# Altium PCB ch32v003f4p6 v1.1.PcbDoc
Units mil, origin at the board's own origin, x right, y up, seen from the top; angles counter-clockwise.
Board outline 1339 x 1105.43 mil, 2 copper layers (Top Layer, Bottom Layer); 32 components, 41 nets, 129 pads, 56 vias.
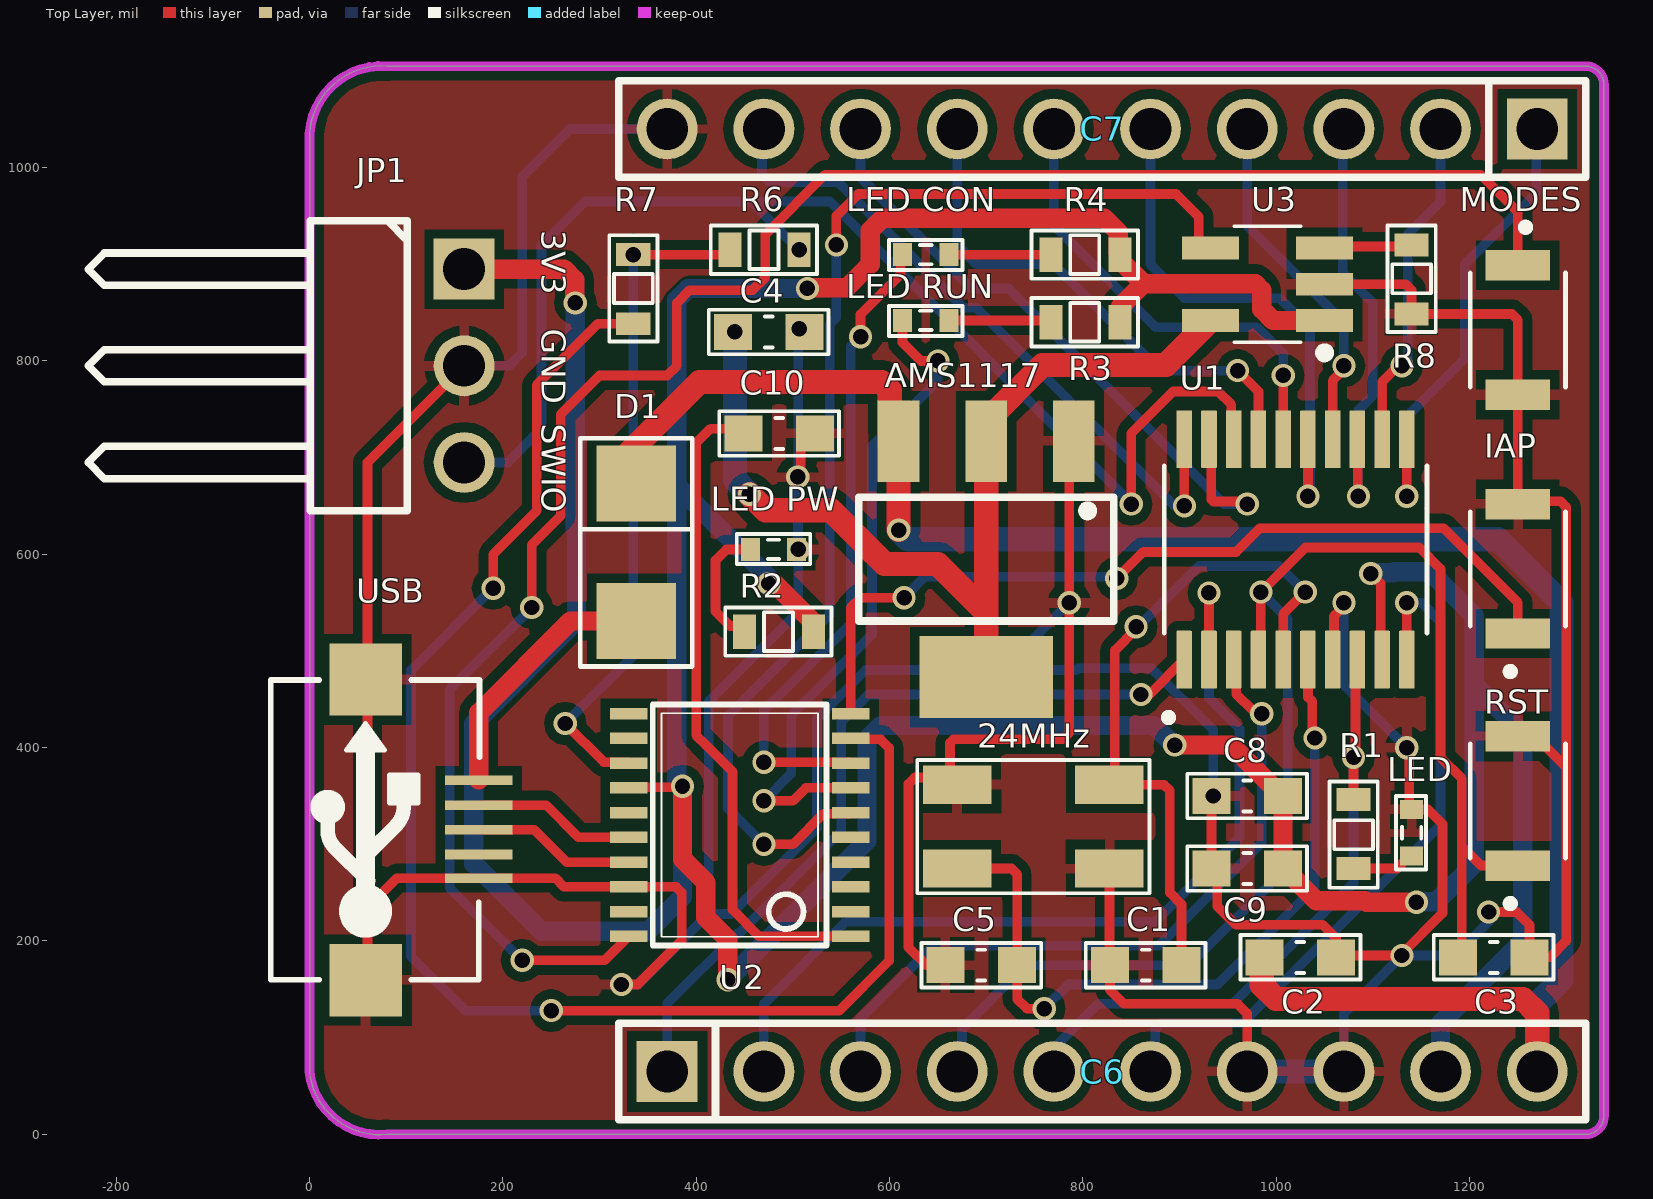
[diagram p0: Top Layer view]
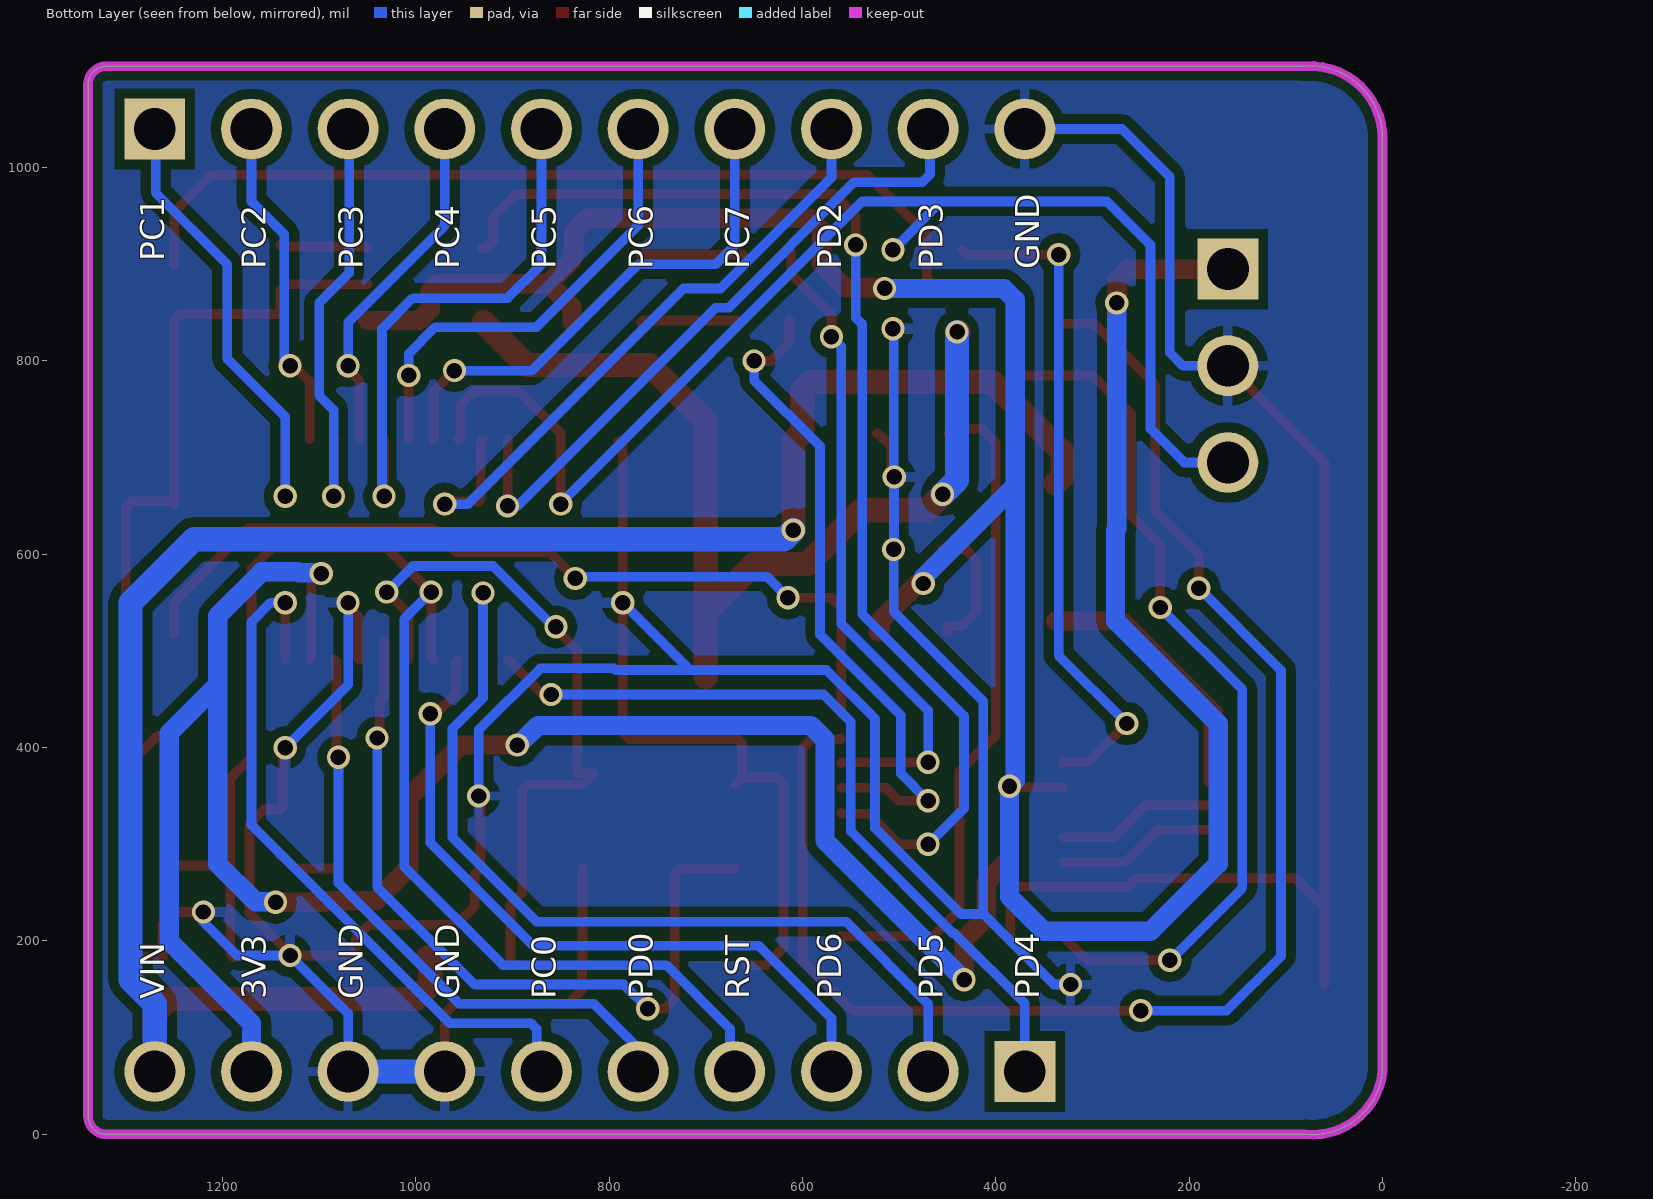
[diagram p1: Bottom Layer view, seen from below]
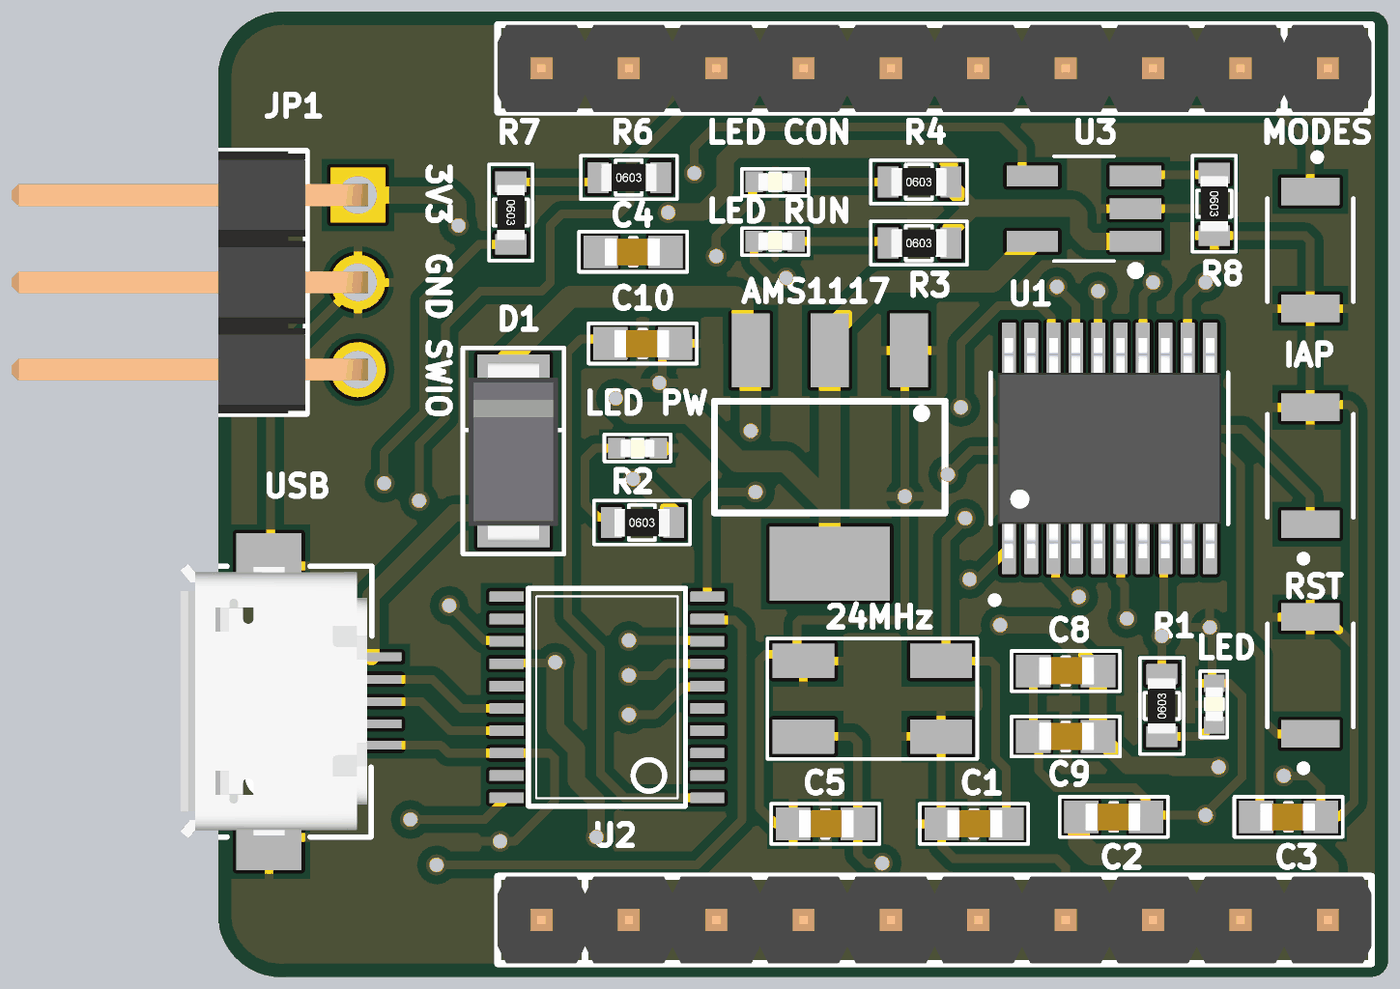
[diagram p2: 3D render of the assembled board from above, using the file's embedded part models]

## Layer stack, top to bottom
Top Solder: solder mask 0.4, Solder Resist, Dk 3.5
Top Layer: signal copper 1.4
Dielectric 1: dielectric 12.6, FR-4, Dk 4.8
Bottom Layer: signal copper 1.4
Bottom Solder: solder mask 0.4, Solder Resist, Dk 3.5

## Board outline
0,65 ccw(c72.5,72.5) 80,0 1320,0 ccw(c1320,19) 1339,19 1339,1086 ccw(c1320,1086) 1320,1105 80,1105 ccw(c75,1030) 0,1035

## Design rules (kind name [scope] priority, off if disabled: settings)
Clearance [All] p1: gap=10 ignorepadtopadclearanceinfootprint=FALSE except(0: Arc-Hole Track-Hole SMDPad-Hole THPad-Hole Via-Hole Fill-Hole Poly-Hole Region-Hole Text-Hole)
PolygonConnect [All] p1: connectstyle=Relief reliefconductorwidth=10 reliefentries=4 polygonreliefangle="90 Angle" airgapwidth=10
RoutingVias [All] p1: holewidth=16 width=24 viastyle="Through Hole" minholewidth=16 minwidth=24 maxholewidth=16 maxwidth=24
SolderMaskExpansion [All] p1: expansion=4
Width [All] p1: maxlimit=25 minlimit=10 preferedwidth=20 minimp=50.000000 maximp=50.000000 favimp=50.000000
30 further rules are at their usual default settings.

## Components (designator, comment, footprint, x,y, rotation, side; value= is the part's Value field where it differs from the comment)
24MHz "24MHz" "Crystal 4 pin SMD 50x32" 748.74,318.31 r180 top (schematic designator Y1)
AMS1117 "AMS1117-3.3V" SOT223 700,595 r180 top value="AMS1117-3.3V SOT223" (schematic designator AMS1)
C1 "104" CAP_0603 865,175 r0 top value=33p
C2 "104" CAP_0603 1025,183.03 r180 top value=33p
C3 "104" CAP_0603 1225,183.03 r180 top value=33p
C4 "104" CAP_0603 475,830 r180 top value=33p
C5 "104" CAP_0603 695,175 r0 top value=33p
C6 "JP10" JP10-D1T 370,65 r0 top
C7 "JP10" JP10-D1T 1270,1040 r180 top
C8 "104" CAP_0603 970,350 r0 top value=33p
C9 "104" CAP_0603 970,275 r0 top value=33p
C10 "104" CAP_0603 485.86,725 r180 top value=33p
D1 "1N4007" DIO-214AC(SMA) 340,605 r270 top
IAP "B3U-1000P" SW_B3U-1000P 1250,585 r90 top (schematic designator S2)
JP1 "JP 1x3 2.54" "JP 1x3 DC" 60,645 r270 top
LED "LED3" CAP_0402 1140,312.03 r90 top (schematic designator LED1)
"LED CON" "LED3" CAP_0402 637.5,910.01 r180 top (schematic designator LED4)
"LED PW" "LED3" CAP_0402 480,605 r0 top (schematic designator LED2)
"LED RUN" "LED3" CAP_0402 637.5,841.94 r180 top (schematic designator LED3)
MODES "B3U-1000P" SW_B3U-1000P 1250,832 r270 top (schematic designator S3)
R1 "1k" RES-SMD-0603 1080,310 r90 top value="R1/4W - 1K"
R2 "1k" RES-SMD-0603 485,520 r0 top value="R1/4W - 1K"
R3 "1k" RES-SMD-0603 802,840 r0 top value="R1/4W - 1K"
R4 "1k" RES-SMD-0603 802,910 r0 top value="R1/4W - 1K"
R6 "100R" RES-SMD-0603 470,915 r0 top value="R1/4W - 1K"
R7 "100R" RES-SMD-0603 335,875 r270 top value="R1/4W - 1K"
R8 "15k" RES-SMD-0603 1140,885 r270 top value="R1/4W - 1K"
RST "B3U-1000P" SW_B3U-1000P 1250,345 r90 top (schematic designator S1)
U1 "CH32V003F4P6" SOP65P640X121-20N 1020,605 r90 top
U2 "CH32V305FBP6" TSSOP-20 445,320 r90 top (schematic designator IC2)
U3 "DIO7002BST5" SOT23-5 990.94,879.33 r180 top (schematic designator IC3)
USB "USB-5" USB-M1 175,315 r90 top (schematic designator J1)

## Footprints (in the part's own frame and the unit in brackets; to place one, negate y for a bottom-side part, rotate by r counter-clockwise, add the part's x,y. Pads: shape width x height; smd on the part's side, far side on the other; paste and mask are expansions set on the pad)
CAP_0402 [mm]
  rect 0.5x0.6 smd: 1(-0.61,0) 2(0.61,0)
  silkscreen extent -0.97,-0.38 0.97,0.41, body extent -0.5,-0.27 0.5,0.26, height 0.35
CAP_0603 [mm]
  rect 1x0.95 smd mask+0.076: 1(-0.94,0) 2(0.94,0)
  silkscreen extent -1.57,-0.58 1.57,0.58, body extent -0.77,-0.39 0.83,0.41, height 0.9
"Crystal 4 pin SMD 50x32" [mm] "Quartz Crystal, SM; Body 6.0 x 3.5 mm (LxW)"
  rect 1.8x1 smd: 1(-2,-1.1) 2(2,-1.1) 3(2,1.1) 4(-2,1.1)
  silkscreen extent -3.05,-1.75 3.05,1.75, body extent -2.48,-1.6 2.53,1.6, height 0.9
DIO-214AC(SMA) [mm] "DO-214AC Diode Smallest Size"
  rect 2x2.1 smd: 1(1.88,-0.051) 2(-1.732,-0.051)
  silkscreen extent -2.92,-1.52 3.07,1.42, body extent -2.5,-1.35 2.7,1.25, height 2.4
JP10-D1T [mm] "10 pins, 1 row, straight, gold plating"
  rect 1.6x1.6 hole 1.1: 1(0,0)
  round 1.6 hole 1.1: 2(2.54,0) 3(5.08,0) 4(7.62,0) 5(10.16,0) 6(12.7,0) 7(15.24,0) 8(17.78,0) 9(20.32,0) 10(22.86,0)
  silkscreen extent -1.27,-1.27 24.13,1.27, body extent -1.27,-1.27 24.13,1.27, height 8.54
"JP 1x3 DC" [mm]
  rect 1.6x1.6 hole 1.1: 1(-6.35,2.54)
  round 1.6 hole 1.1: 2(-3.81,2.54) 3(-1.27,2.54)
  silkscreen extent -7.62,-7.34 0,1.04, body extent -7.62,-7.52 0,2.84, height 2.55
RES-SMD-0603 [mm]
  rect 0.6x0.9 smd: 1(-0.889,0) 2(0.927,0)
  silkscreen extent -1.4,-0.64 1.4,0.64, body extent -0.8,-0.4 0.8,0.4, height 0.43
SOP65P640X121-20N [mm]
  rrect12% 1.52x0.41 smd: 1(-2.895,2.925) 2(-2.895,2.275) 3(-2.895,1.625) 4(-2.895,0.975) 5(-2.895,0.325) 6(-2.895,-0.325) 7(-2.895,-0.975) 8(-2.895,-1.625) 9(-2.895,-2.275) 10(-2.895,-2.925) 11(2.895,-2.925) 12(2.895,-2.275) 13(2.895,-1.625) 14(2.895,-0.975) 15(2.895,-0.325) 16(2.895,0.325) 17(2.895,0.975) 18(2.895,1.625) 19(2.895,2.275) 20(2.895,2.925)
  silkscreen extent -4.51,-3.45 2.2,3.45, body extent -3.2,-3.25 3.2,3.25, height 1.1
SOT23-5 [mm] "SOT23, 5-Leads, Body 3.0x3.0mm (max), Pitch 0.95mm, IPC Medium Density"
  rect 1.5x0.6 smd: 1(-1.5,0.95) 2(-1.5,0) 3(-1.5,-0.95) 4(1.5,-0.95) 5(1.5,0.95)
  silkscreen extent -1.63,-1.52 0.87,1.92, body extent -1.75,-1.52 1.75,1.53, height 1.45
SOT223 [mm] "SOT-223/SC-73; 4 Leads; Body 6.7 x 7.3 mm, inc. leads (LxW max)"
  rect 1.1x2.15 smd: 1(-2.3,-3.1) 2(0,-3.1) 3(2.3,-3.1)
  rect 3.5x2.15 smd: 4(0,3.1)
  silkscreen extent -3.35,-1.63 3.35,1.63, body extent -3.43,-1.65 3.43,1.65, height 2.54
SW_B3U-1000P [mm]
  rect 0.8x1.7 smd: 1(-1.7,0) 2(1.7,0)
  silkscreen extent -2.8,-1.25 1.5,1.25
TSSOP-20 [mil] "TSSOP-20"
  rect 12x39 smd: 1(-115.16,-114.87) 2(-89.57,-114.87) 3(-63.98,-114.87) 4(-38.39,-114.87) 5(-12.8,-114.87) 6(12.8,-114.87) 7(38.39,-114.87) 8(63.98,-114.87) 9(89.57,-114.87) 10(115.16,-114.87) 11(115.16,114.87) 12(89.57,114.87) 13(63.98,114.87) 14(38.39,114.87) 15(12.8,114.87) 16(-12.8,114.87) 17(-38.39,114.87) 18(-63.98,114.87) 19(-89.57,114.87) 20(-115.16,114.87)
  silkscreen extent -125,-90 125,90
USB-M1 [mil]
  rect 10x70 smd: 1(51.18,0) 2(25.59,0) 3(0,0) 4(-25.59,0) 5(-50,0)
  rect 74.8x74.8 smd: 5(-155.51,116.84) 5(155.51,116.84)
  silkscreen extent -155,-1 155,215, body extent -157,5 158,218, height 107

## Part data
24MHz: library part "XTAL_4Pin SMD", "Crystal Oscillator", LatestRevisionDate=17-Jul-2002, LatestRevisionNote="Re-released for DXP Platform.", PackageReference=R38, Published=8-Jun-2000, Publisher="Altium Limited"
AMS1117: library part "AMS1117 SMD", "Dán", Chung_Loai=Dán, Don_Vi=Con, Ma_Hang=MH000596
C1 C2 C3 C4 C5 C8 C9 C10: library part CapSMD, "Capacitor", LatestRevisionDate=17-Jul-2002, LatestRevisionNote="Re-released for DXP Platform.", PackageReference=RAD-0.3, Published=8-Jun-2000, Publisher="Altium Limited"
C6 C7: "WR-PHD 2.54 mm Angled Socket Header", Manufacturer="W¨¹rth Elektronik eiSos GmbH", partNo=613010143121, ComponentLink1 Description=Manufacturer, ComponentLink1URL=http://www.we-online.com, ComponentLink2 Description=Datasheet, ComponentLink2URL=http://katalog.we-online.de/em/datasheet/6130xx143121.pdf, Created by="Karrer Zheng", Created Date="29 March 2013", NoPins=10
D1: library part D1A, "Diode 1A"
IAP MODES RST: "Switch Tactile N.O. SPST Round Button Gull Wing 0.05A 12VDC 1.5N SMD Embossed T/R", Package=None, Availability=Unavailable, MP=B3U-1000P, Price=None
JP1: library part "JP 1x3 2.54 Duc Cong", "C?m", Chung_Loai=C?m, Don_Vi=Con, Ma_Hang=MH000904, Ten_Linh_Kien="Jump Ðon Ð?c 2.54MM 1x40P Cong Ð?ng"
LED "LED CON" "LED PW" "LED RUN": library part LED0805, "LED SMD 0805"
R1 R2 R3 R4 R6 R7 R8: library part RES, "Resistor 1/4W"
U1: "Industrial-grade general-purpose microcontroller", Package=Package, Check_prices=https://www.snapeda.com/parts/CH32V003F4P6/WCH/view-part/?ref=eda, MF=WCH, MP=CH32V003F4P6, SnapEDA_Link=https://www.snapeda.com/parts/CH32V003F4P6/WCH/view-part/?ref=snap
U3: library part "DIO7002BST5 SMD"
USB: Manufacturer=FCI, Manufacturer Part Number=10118193-0001LF, Supplier Part Number 1=609-4616-1-ND, .Checked PCB=RF, .Checked SCH=MM, .Creator=MM, Category="Connectors, Interconnects", ComponentLink1Description=http://portal.fciconnect.com/Comergent//fci/drawing/10118193.pdf, ComponentLink1URL=http://portal.fciconnect.com/Comergent//fci/drawing/10118193.pdf, Connector Type="USB - micro B", Features="Shielded, Solder Retention", Gender=Receptacle, Ingress Protection=-, Mounting Type="Surface Mount, Right Angle, Horizontal", Number of Contacts=5, Packaging="Cut Tape (CT)", Pricing 1="1=0.46, 10=0.433, 25=0.3712, 50=0.3156, 100=0.3032, 250=0.27224, 500=0.25988 (USD)", RoHS="RoHS Compliant", Specifications="USB 2.0", Stock 1=28642, Supplier 1=Digi-Key

## Via types
v1: diameter 24, hole 16, Top Layer to Bottom Layer, tented both sides, 56 vias

## Nets (pads, with @x,y where several pads share a name; then routed paths per layer and width w, separated by ;. In a path a pad name is that pad's centre, name@x,y a point inside that pad or via, vN(x,y) a via of type N, cw(c..) or ccw(c..) an arc to the next point about the centre after c; other vN are vias at no path point)
3V3: C6.9 C8.2 C9.2 JP1.1 R2.2 R3.2 R4.2 U1.9 U2.14 U3.1 | length 4994.3
  Top Layer w10: U2.14 330.93,359.19 385.05,359.19 v1(385.86,360) ; v1(1097.82,580) 1108,569.82 1108,492.59 U1.9
  Top Layer w20: JP1.1 263.28,895 274.23,884.05 274.23,860.77 v1(275,860) ; v1(385.86,360) 385.86,284.71 410.05,260.52 410.05,224.44 432.49,202 432.49,160.37 v1(432.86,160) ; v1(475,569.82) 481.05,569.82 519.7,531.17 519.7,521.79 R2.2 ; v1(515,875) 515.77,875.77 555.77,875.77 580,900 580,935 592.72,947.72 822.24,947.72 836.68,933.28 836.68,911.82 R4.2 838.49,904.1 862.59,880 ; R3.2 838.49,855.9 862.59,880 ; v1(895,402.68) 953.34,402.68 1006.02,350 C8.2 C9.2 1007.98,275 1041.25,241.74 1091.72,241.74 1093.45,240 v1(1145,240) ; U3.1 996.72,841.93 985,853.64 985,873.21 978.21,880 862.59,880
  Bottom Layer w20: v1(275,860) 275,626.21 276.21,625 276.21,531.21 170,425 170,280 240,210 350,210 385.86,245.86 v1(385.86,360) 380,365.86 380,670.87 ; v1(432.86,160) 576.63,303.77 576.63,408.37 591.26,423 873.6,423 893.15,403.44 894.23,403.44 v1(895,402.68) ; v1(475,569.82) 475,575.87 380,670.87 ; v1(515,875) 391.72,875 380,863.28 380,670.87 ; v1(1097.82,580) 1098.58,580.77 1120.67,580.77 1121.82,581.92 1159.2,581.92 1205,536.12 1205,465 ; v1(1145,240) 1145.77,240.77 1165.77,240.77 1205,280 1205,465 ; C6.9 1170,115 1255,200 1255,415 1205,465
3V3IN: AMS1117.2 AMS1117.4 C4.2 U3.5 | length 1008.8
  Top Layer w25: C4.2 v1(440,830) ; v1(455,662.2) 471.7,645.5 539.5,645.5 574.45,610.55 ; 574.45,610.5 594.95,590 649.92,590 700,539.92 ; AMS1117.4 700,539.92 ; U3.5@930,840.04 885.85,795.89 758.17,795.89 700,737.72 700,539.92
  Bottom Layer w25: v1(440,830) 440,677.2 v1(455,662.2)
5VIN: AMS1117.3 C2.2 C6.10 D1.2 | length 2086.2
  Top Layer w25: D1.2 330.93,680.27 330.93,705.93 403.36,778.36 591.64,778.36 600.3,769.7 600.3,726.2 AMS1117.3 v1(609.45,625) ; C2.2 985,180.03 985,154.64 999.64,140 1255.36,140 1270,125.36 C6.10
  Bottom Layer w25: v1(609.45,625) 618.95,615.5 1229.5,615.5 1295,550 1295,160 1270,135 C6.10
D+: U2.17 USB.3 | length 169
  Top Layer w10: USB.3 232.59,315 265.98,281.61 U2.17
D-: U2.16 USB.2 | length 169
  Top Layer w10: USB.2 244.9,340.59 278.28,307.2 U2.16
D_SWCLK: U2.15
D_SWDIO: R6.1 R7.1 U2.13 | length 702.4
  Top Layer w10: v1(264.49,425) 304.51,384.98 329.13,384.98 U2.13 ; R7.1@332.5,907.5 v1(335,910) 430,910.01 R6.1
  Bottom Layer w10: v1(264.49,425) 335,495.51 v1(335,910)
GND: 24MHz.2 24MHz.4 "LED PW.2" AMS1117.1 C1.1 C2.1 C3.1 C4.1 C5.1 C6.7 C6.8 C7.10 C8.1 C9.1 C10.1 IAP.2 JP1.2 LED.2 MODES.2 R8.2 RST.2 U1.7 U2.18 U3.2 USB.5 | length 6662.8
  Top Layer w10: USB.5@60,155 60,235 ; USB.5@60,466.02 60,235 ; USB.5@60,471.02 60,695 JP1.2 ; v1(322.68,155) 339.48,155 385.05,200.57 385.05,250.17 379.19,256.02 U2.18 263.28,256.02 254.31,265 175,265 90.35,265 60.35,235 60,235 ; v1(505,680) 505,683.79 508.17,686.96 508.17,711.3 521.87,725 C10.1 ; C5.1 638.03,175 619.57,193.47 619.57,362.55 626.15,369.13 24MHz.2@662.48,369.13 ; 24MHz.2 24MHz.2@662.48,369.13 ; AMS1117.1 786,712.5 v1(786,549.92) 786,415.42 779.14,408.57 666.05,408.57 662.48,405 24MHz.2@662.48,369.13 ; 24MHz.4 827.48,175.52 C1.1 828,149.54 842.54,135 960,135 970,125 C6.7 ; C8.1@933,345 C9.1 939.14,268.86 939.14,235.86 958.26,216.74 1048.26,216.74 1062,203 C2.1 1063.97,185 v1(1130,185) 1130,186.82 1172,228.82 1172,321 1156.97,336.03 LED.2 1137.5,338.53 1137.5,397.5 v1(1135,400) ; U3.2 1134.15,879.33 1140,873.47 R8.2 1243.93,848.51 1250,842.45 MODES.2 IAP.2 1253.07,655 1294.14,655 1300,649.14 1300,380 ; U1.7 1059.73,492.37 1059.73,535.94 1070,546.21 v1(1070,550) ; v1(1219.63,230) 1248.74,230 1262,216.74 C3.1 1283,183.03 1300,200.03 1300,380 ; RST.2 1267.72,411.93 1299.65,380 1300,380
  Bottom Layer w10: JP1.2 206.5,795 220,808.5 220,990.51 269.49,1040 C7.10@375,1040 ; v1(322.68,155) 340,155 412.86,227.86 ; v1(506.49,833.28) 505.74,832.54 505.74,680.74 v1(505,680) 505.37,679.63 505.37,605.37 v1(505.74,605) 505.74,540.74 412.86,447.86 412.86,227.86 ; v1(786,549.92) 716.48,480.4 ; v1(935,350) 935,418.18 871.18,482 794.63,482 793.03,480.4 716.48,480.4 ; C6.8 1070,125 v1(1130,185) 1185,185 1219.63,219.63 v1(1219.63,230) ; v1(1070,550) 1070,465 v1(1135,400) ; 412.86,227.86 436.04,227.86 525,316.82 525,430 575.4,480.4 716.48,480.4
  Bottom Layer w25: C6.7 C6.8
IAP: IAP.1 U2.10 | length 899.3
  Top Layer w10: U2.10 559.87,544.87 570,555 v1(615,555) ; v1(835,575) 862.34,602.34 958.59,602.34 983.25,627 1173,627 1250,550 IAP.1
  Bottom Layer w10: v1(615,555) 636.92,576.92 833.08,576.92 v1(835,575)
LED_CON: "LED CON.2" U2.8 | length 677.3
  Top Layer w10: v1(470,385) 558.85,385 U2.8 ; v1(570,825) 570,848.3 611.7,890 611.7,908.2 613.5,910.01 611.7,911.82
  Bottom Layer w10: v1(470,385) 470,438.51 560,528.51 560,815 v1(570,825)
LED_RUN: "LED RUN.2" U2.7 | length 692.2
  Top Layer w10: v1(470,345) 500,345 513.39,358.39 U2.7 ; 613.5,841.94 613.5,819.09 632.6,800 v1(650,800)
  Bottom Layer w10: v1(470,345) 498.18,373.18 498.18,433.18 581.95,516.95 581.95,711.95 650,780 v1(650,800)
MODES: MODES.1 U2.20 | length 1991.9
  Top Layer w10: v1(220,180) 305.28,180 U2.20 ; v1(230,545) 230,610 260,640 260,745 300,785 370,785 380,795 380,860 393.21,873.21 458.21,873.21 471.49,886.49 471.49,930.75 533.46,992.72 1211.43,992.72 1250,954.14 MODES.1
  Bottom Layer w10: v1(220,180) 145,255 145,460 v1(230,545)
NetC10_2: C10.2 U2.1 | length 698
  Top Layer w10: C10.2@440,725 C10.2 443.86,730 415,730 400,715 400,412.68 410,402.68 437.5,375.18 437.5,232.34 465,204.84 U2.1
NetIC3_3: R8.1 U3.3 | length 91.4
  Top Layer w10: U3.3 1051.64,918.37 1138.36,918.37 R8.1
NetLED1_1: LED.1 R1.1 | length 65.4
  Top Layer w10: R1.1 1125,275 1138.03,288.03 LED.1
NetLED2_1: "LED PW.1" R2.1 | length 135.7
  Top Layer w10: R2.1 450,525.91 435.04,525.91 420,540.94 420,593.84 431.16,605 456,605
NetLED3_1: "LED RUN.1" R3.1 | length 106.3
  Top Layer w10: 661.5,841.94 765.06,841.94 R3.1
NetLED4_1: "LED CON.1" R4.1 | length 105.5
  Top Layer w10: 661.5,910.01 R4.1
PB12: U2.5
PB13: U2.6 U3.4 | length 1249.8
  Top Layer w10: v1(470,300) 500,300 531.8,331.8 558.87,331.8 U2.6 ; v1(545,920) 545,950 567.72,972.72 896.43,972.72 920,949.14 920,923.54 926.81,916.73 U3.4
  Bottom Layer w10: v1(470,300) 432.86,337.14 432.86,432.86 538.18,538.18 538.18,838.18 545,845 v1(545,920)
PC0: C6.6 U1.10 | length 740.7
  Top Layer w10: v1(1135.08,549.92) 1135.08,491.1 U1.10
  Bottom Layer w10: C6.6 875,70 875,109.14 880.86,115 965,115 1170,320 1170,530 1150.08,549.92 v1(1135.08,549.92)
PC1: C7.1 U1.11 | length 497
  Top Layer w10: v1(1135,660) 1135.08,660.08 1135.08,718.9 U1.11
  Bottom Layer w10: v1(1135,660) 1135,742 1195,802 1195,900 1269,974 1269,1034 C7.1@1275,1040
PC2: C7.2 U1.12 | length 348.3
  Top Layer w10: U1.12 1109.57,778.36 1126.21,795 v1(1130,795)
  Bottom Layer w10: v1(1130,795) 1136,801 1136,931 1170,965 C7.2
PC3: C7.3 U1.13 | length 460.9
  Top Layer w10: U1.13 1084.49,718.46 1084.49,660.51 v1(1085,660)
  Bottom Layer w10: C7.3@1075,1040 1069,1034 1069,891 1100,860 1100,764.39 1085,749.39 v1(1085,660)
PC4: C7.4 U1.14 | length 374.3
  Top Layer w10: U1.14 1058.39,779.6 1070,791.21 v1(1070,795)
  Bottom Layer w10: C7.4 C7.4@970,1035 ; C7.4@975,1040 C7.4@970,1035 ; v1(1070,795) 1070,840 970,940 C7.4@970,1035
PC5: C7.5 U1.15 | length 565.8
  Top Layer w10: v1(1032.8,660) U1.15
  Bottom Layer w10: C7.5 870,900 905,865 1003.28,865 1035,833.28 1035,662.2 v1(1032.8,660)
PC6: C7.6 U1.16 | length 480.8
  Top Layer w10: U1.16 v1(1007.2,785)
  Bottom Layer w10: C7.6 770,940 875,835 980,835 1007.2,807.8 v1(1007.2,785)
PC6_WCH: R7.2 U2.9 | length 1574
  Top Layer w10: v1(190,565) 190,600 235,645 235,775 298.52,838.52 R7.2 ; v1(250,128) 548,128 599.57,179.57 599.57,399.58 590.58,408.57 560.87,408.57 U2.9
  Bottom Layer w10: v1(190,565) 105,480 105,184.14 161.14,128 v1(250,128)
PC7: C7.7 U1.17 | length 543.8
  Top Layer w10: v1(960,790) 981.61,768.39 U1.17
  Bottom Layer w10: C7.7 670,920 690,900 770,900 880,790 v1(960,790)
PD0: C6.5 R1.2 U1.8 | length 681.1
  Top Layer w10: R1.2 v1(1080,390) 1081.99,391.99 1081.99,489.04 U1.8
  Bottom Layer w10: C6.5 770,89.14 815.86,135 955,135 1080,260 v1(1080,390)
PD2: C7.8 U1.19 | length 692.5
  Top Layer w10: U1.19 932.95,716.46 932.95,656.66 935,654.61 967.32,654.61 v1(970,651.93)
  Bottom Layer w10: C7.8 570,989.75 684.75,875 723,875 946.07,651.93 v1(970,651.93)
PD3: C7.9 U1.20 | length 695.9
  Top Layer w10: U1.20 904.92,718.9 904.92,650.08 v1(905,650)
  Bottom Layer w10: C7.9 468,1038 468,993 476,985 546.47,985 676.47,855 690,855 895,650 v1(905,650)
PD4: C6.1 U1.1 | length 818.8
  Top Layer w10: v1(860,455) 868.82,455 U1.1
  Bottom Layer w10: C6.1 370,135.33 442.53,207.86 444.33,207.86 550,313.53 550,426.72 578.28,455 v1(860,455)
PD5: C6.2 U1.2 | length 968.3
  Top Layer w10: U1.2 v1(930.43,560)
  Bottom Layer w10: C6.2 470,135 555,220 875,220 962,307 962,419.82 930.43,451.38 v1(930.43,560)
PD6: C6.3 U1.3 | length 750.2
  Top Layer w10: U1.3 958.54,488.5 958.54,455.46 976.32,437.68 982.32,437.68 v1(985,435)
  Bottom Layer w10: C6.3 570,120 645,195 878.43,195 985,301.57 v1(985,435)
RST: C3.2 C6.4 RST.1 U1.4 | length 1512.1
  Top Layer w10: U1.4 984.13,493.54 v1(984.13,560.87) 1030.27,607 1148,607 1170,585 1170,390 1192,368 1192,298 ; C3.2 1192,187.03 1192,298 ; RST.1 1211.93,278.07 1192,298
  Bottom Layer w10: C6.4 675,70 675,109.14 740.86,175 910,175 1012,277 1012,533 v1(984.13,560.87)
RST-WHC: U2.11
SWIO: JP1.3 R6.2 U1.18 | length 1351.4
  Top Layer w10: v1(850,651.93) 850,725.04 893.35,768.39 940,768.39 953.5,754.88 953.5,721.5 U1.18
  Bottom Layer w10: JP1.3 205,695 240,730 240,920 285,965 456.49,965 ; v1(506.49,915) 456.49,965 ; v1(850,651.93) 850,653.18 538.18,965 456.49,965
VCC: D1.1 USB.1 | length 271.7
  Top Layer w20: USB.1@175,366.69 175,436 270,531 D1.1
XI: 24MHz.1 C1.2 U1.5 | length 736.6
  Top Layer w10: v1(855,525) 855,522.75 833,500.75 833,373.24 815.86,373.24 24MHz.1 884.14,361.61 890,355.76 890,250 902,238 C1.2 ; U1.5 1007.2,538.07 v1(1030,560.87)
  Bottom Layer w10: v1(855,525) 857.25,525 920.12,587.87 1003,587.87 v1(1030,560.87)
XO: 24MHz.3 C5.2 U1.6 | length 816
  Top Layer w10: 24MHz.3 726.14,275 732,269.14 C5.2 732,140 742,130 v1(760,130) ; U1.6@1032.8,511.02 U1.6 1032.8,452.2 1037.32,447.68 1037.32,412.68 v1(1040,410)
  Bottom Layer w10: v1(760,130) 785,155 939.13,155 1040,255.87 v1(1040,410)
pads on no net: U2.2 U2.3 U2.4 U2.12 U2.19 USB.4

## Polygon pours and split planes (outlines as drawn)
GND on Bottom Layer "GND_L02_P000" (solid, pour order 0): 0,1035 5,1040 5,1065 40,1100 60,1100 65,1105 1320,1105 1325,1100 1330,1100 1339,1091 1339,10 1335,10 1325,0 1275,0 60,0 55,5 40,5 0,45
GND on Top Layer "GND_L01_P004" (solid, pour order 4): 1310,1105 1320,1105 1325,1100 1335,1100 1339,1096 1339,9 1330,0 1290,0 80,0 50,0 40,10 30,10 5,35 5,55 0,60 0,1050 5,1055 5,1060 10,1065 10,1070 35,1095 45,1095 55,1105 80,1105 225,1105 1320,1105

## Keep-outs
Keep-Out Layer:
  the board outline again, w10

## Silkscreen, mask and mechanical layers (free items; w line width, h text height)
Top Overlay:
  text "3V3" at 240,935 h25 r270
  text "GND" at 240,833.28 h25 r270
  text "SWIO" at 240,735.28 h25 r270
Bottom Overlay:
  text "PC1" at 1260,903.33 h25 r270
  text "GND" at 355,895 h25 r270
  text "PD3" at 455,895 h25 r270
  text "PD2" at 560,895 h25 r270
  text "PC7" at 655,895 h25 r270
  text "PC6" at 755,895 h25 r270
  text "PC5" at 855,895 h25 r270
  text "PC4" at 955,895 h25 r270
  text "PC3" at 1055,895 h25 r270
  text "PC2" at 1155,895 h25 r270
  text "PD4" at 355,140 h25 r270
  text "PD5" at 455,140 h25 r270
  text "PD6" at 560,140 h25 r270
  text "RST" at 655,140 h25 r270
  text "PD0" at 755,140 h25 r270
  text "PC0" at 855,140 h25 r270
  text "GND" at 955,140 h25 r270
  text "GND" at 1055,140 h25 r270
  text "3V3" at 1155,140 h25 r270
  text "VIN" at 1260,140 h25 r270